# Altium PCB 388D_Control_v1_PCB1_harry.PcbDoc (part 5 of 5)
Units mil, origin at the board's own origin, x right, y up, seen from the top; angles counter-clockwise.
Board outline 4800 x 4000 mil, 6 copper layers (Top Layer, Singal Layer 2, Signal layer 3, Signal Layer 4, Signal Layer 5, Bottom Layer), stack 32.7 mil thick; 431 components, 469 nets, 2000 pads, 719 vias.
Unrouted connection lines stored in the file: 971.
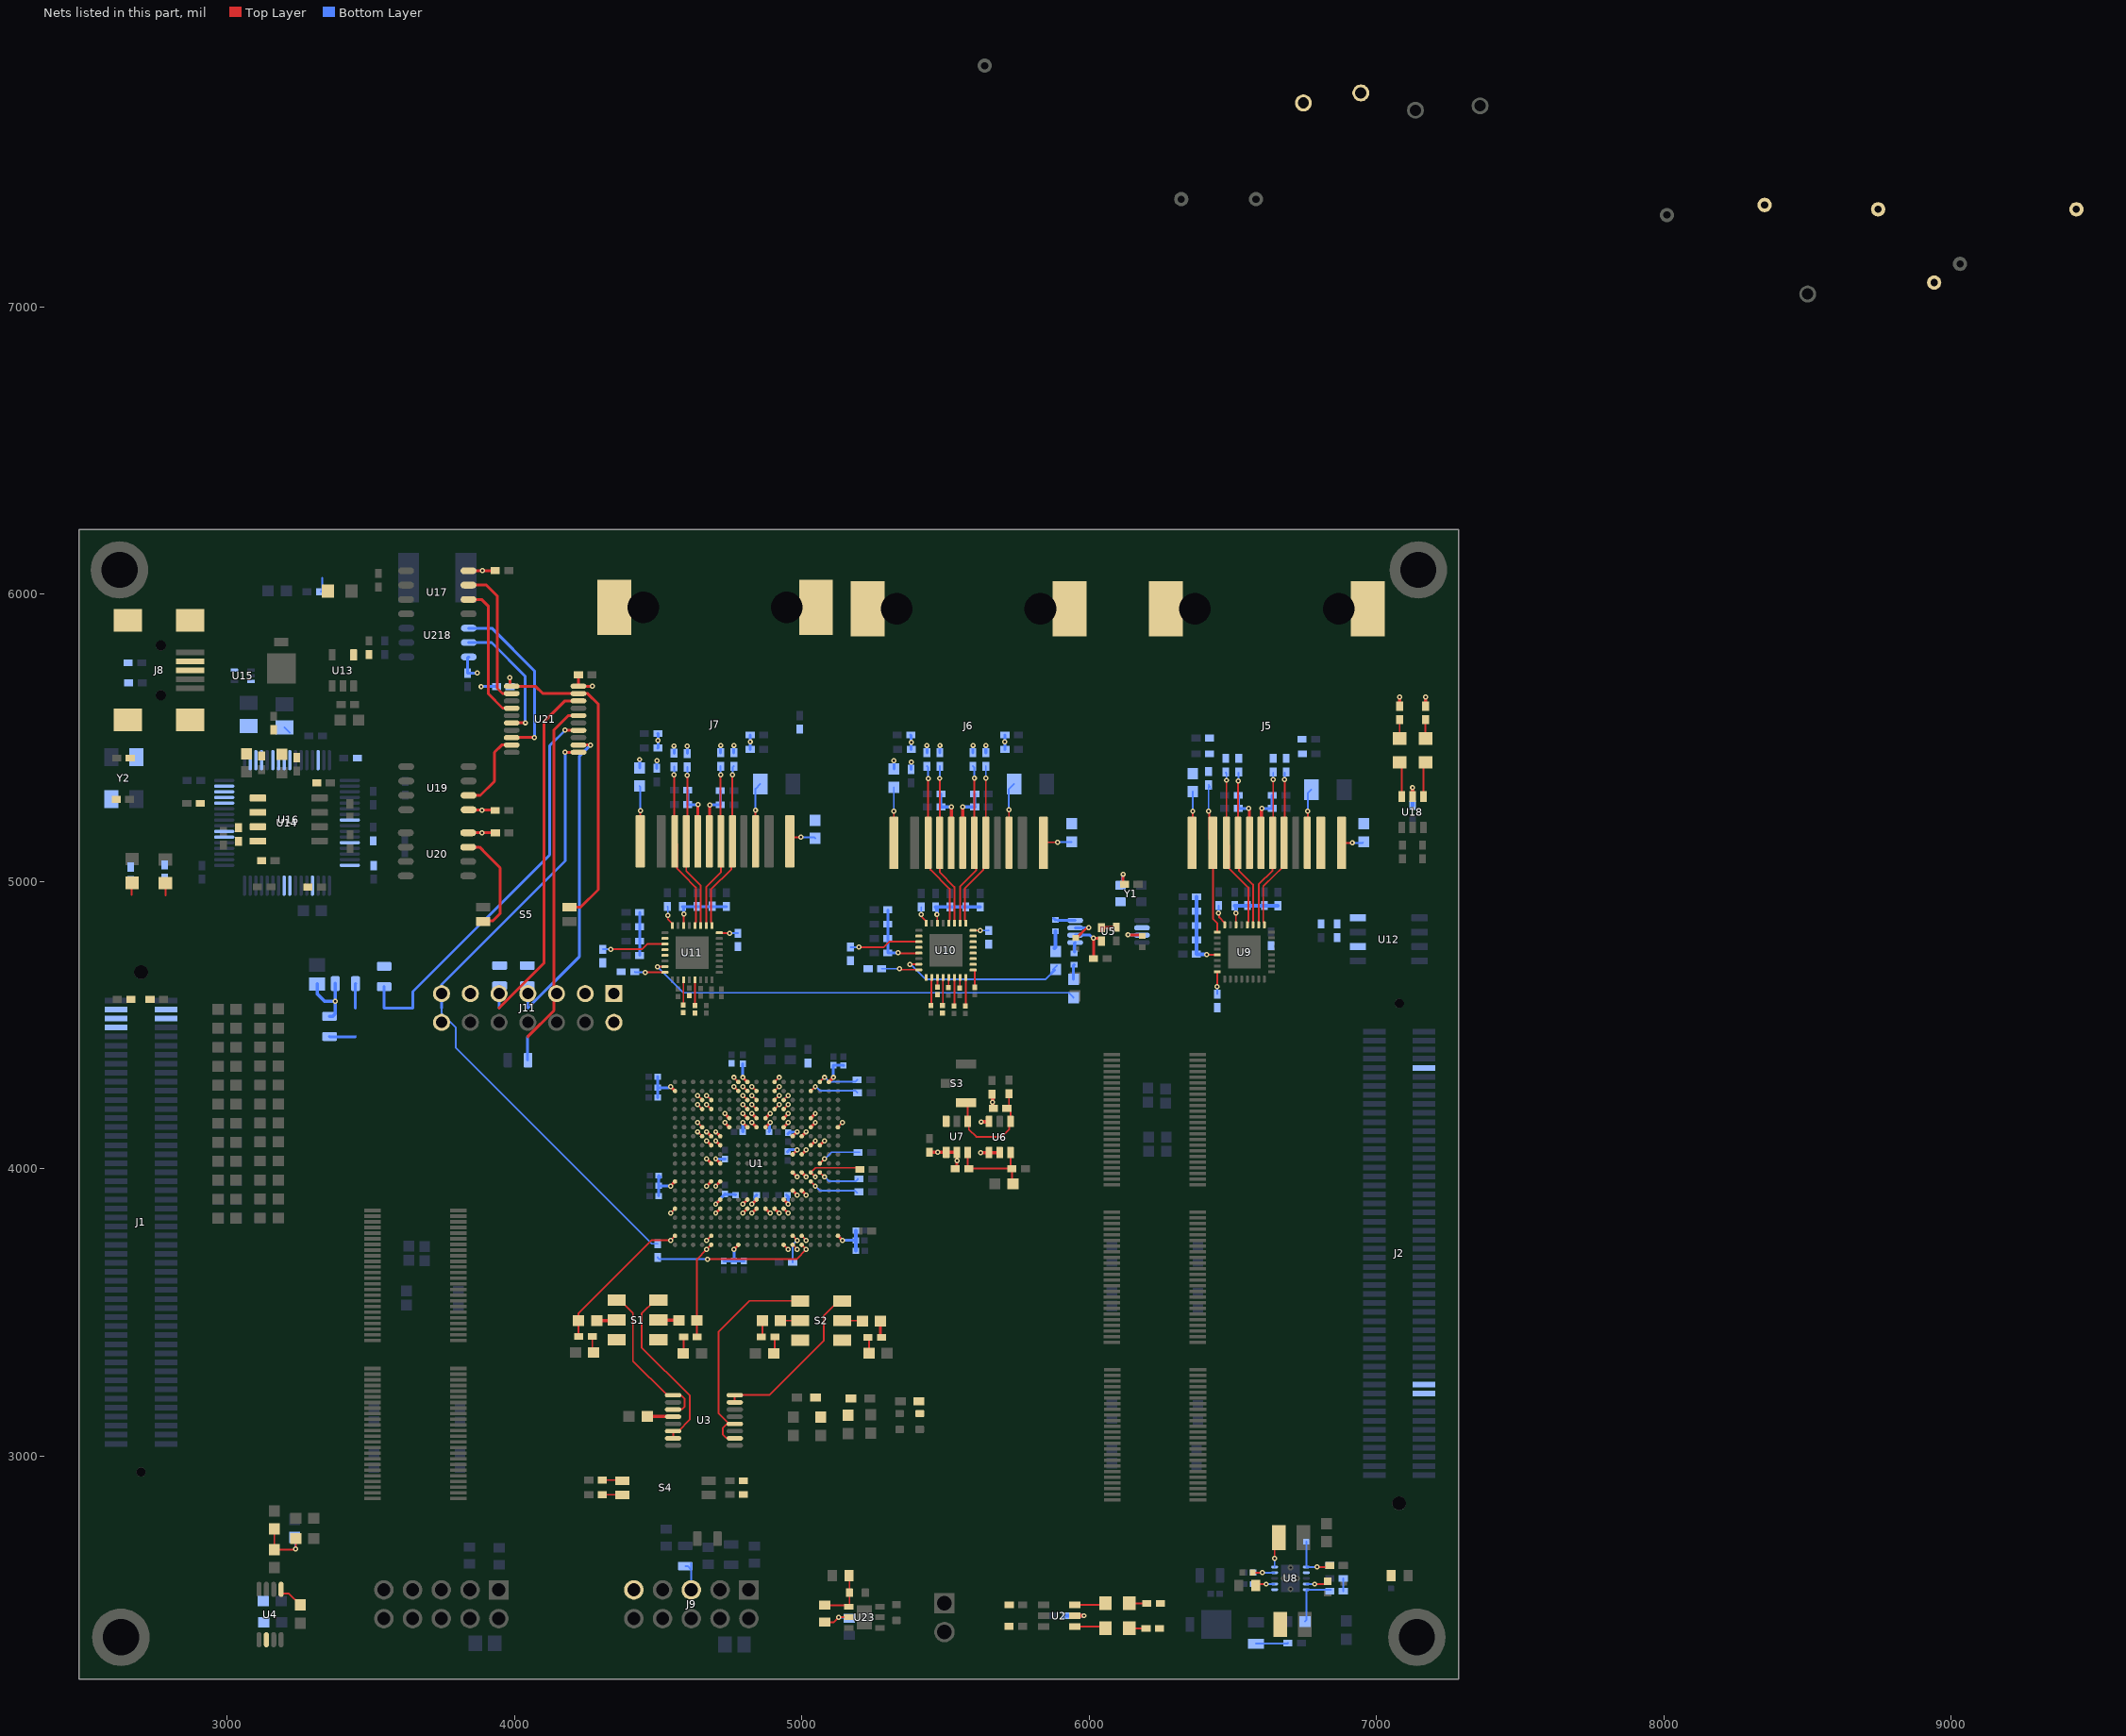
[diagram p5: the nets of this part, all layers, seen from the top]

## Via types
v1: diameter 18, hole 8, Top Layer to Bottom Layer, tented both sides, 703 vias
v2: diameter 19.68, hole 7.87, Top Layer to Bottom Layer, tented both sides, 15 vias
v3: diameter 18/18/18/18/18/18 (per signal layer), hole 8, Top Layer to Bottom Layer, tented both sides, 1 vias

## Nets (pads, with @x,y where several pads share a name; then routed paths per layer and width w, separated by ;. In a path a pad name is that pad's centre, name@x,y a point inside that pad or via, vN(x,y) a via of type N, cw(c..) or ccw(c..) an arc to the next point about the centre after c; other vN are vias at no path point) (continued)
MCU_GPIO151: R101.1 U1.C13 U12.6 | length 22.3
  Top Layer w6.25: U1.C13@4936.26,4239.72 v1(4952.01,4255.47)
MCU_GPIO152: U1.D13 U10.20 U11.20 | length 22.3
  Top Layer w6.25: U1.D13@4936.26,4208.23 v1(4952.01,4223.98)
MCU_GPIO153: R107.2 R132.2 U1.A12 U10.19 U11.19 | length 491.2
  Top Layer w6.25: v1(4334.38,4764.62) 4443.62,4764.62 4461.53,4782.53 4483.53,4782.53 U11.19@4523.27,4782.53 ; U1.A12@4904.76,4302.72 v1(4920.51,4318.46) ; v1(5199,4772) 5285,4772 5303.59,4790.59 U10.19@5406.57,4790.59
  Bottom Layer w6.25: R132.2@4307,4764.62 v1(4334.38,4764.62) ; R107.2@5169,4772 v1(5199,4772)
MCU_GPIO154: J2.92 U1.B12 | length 22.3
  Top Layer w6.25: U1.B12@4904.76,4271.22 v1(4920.51,4286.97)
MCU_GPIO155: U1.C12 U10.18 U11.18 | length 22.3
  Top Layer w6.25: U1.C12@4904.76,4239.72 v1(4920.51,4255.47)
MCU_GPIO156: U1.D12 U10.3 | length 22.3
  Top Layer w6.25: U1.D12@4904.76,4208.23 v1(4920.51,4223.98)
MCU_GPIO157: U1.B10 U10.2 | length 22.3
  Top Layer w6.25: v1(4826.02,4286.97) U1.B10@4841.77,4271.22
MCU_GPIO158: U1.C10 U10.4 | length 22.3
  Top Layer w6.25: v1(4826.02,4255.47) U1.C10@4841.77,4239.72
MCU_GPIO159: U1.D10 U10.5 | length 22.3
  Top Layer w6.25: v1(4826.02,4223.98) U1.D10@4841.77,4208.23
MCU_GPIO160: U1.B9 U10.6 | length 22.3
  Top Layer w6.25: v1(4794.53,4286.97) U1.B9@4810.28,4271.22
MCU_GPIO161: U1.C9 U10.7 | length 22.3
  Top Layer w6.25: v1(4794.53,4255.47) U1.C9@4810.28,4239.72
MCU_GPIO162: R111.2 U1.D9 U10.26 | length 118.2
  Top Layer w6.25: v1(4794.53,4223.98) U1.D9@4810.28,4208.23 ; R111.2@5450.93,4570.99 5450.93,4665.65 U10.26@5451.85,4666.58
MCU_GPIO163: U1.A8 U10.25 | length 22.3
  Top Layer w6.25: v1(4763.03,4318.46) U1.A8@4778.78,4302.72
MCU_GPIO164: R102.1 U1.B8 U10.28 | length 118.1
  Top Layer w6.25: v1(4763.03,4286.97) U1.B8@4778.78,4271.22 ; R102.1@5490.61,4570.99 5490.61,4665.97 U10.28@5491.22,4666.58
MCU_GPIO165: R112.2 U1.C5 U10.30 | length 119
  Top Layer w6.25: v1(4668.54,4255.47) U1.C5@4684.29,4239.72 ; R112.2@5530.3,4569.99 5530.3,4666.28 U10.30@5530.59,4666.58
MCU_GPIO166: R113.2 U1.D5 U10.31 | length 59.4
  Top Layer w6.25: v1(4668.54,4223.98) U1.D5@4684.29,4208.23 ; R113.2@5549,4629.99 5549.64,4630.63 5549.64,4665.94 U10.31@5550.27,4666.58
MCU_GPIO167: R114.2 U1.C4 U10.32 | length 118.9
  Top Layer w6.25: v1(4637.05,4255.47) U1.C4@4652.8,4239.72 ; R114.2@5569.98,4570.01 U10.32@5569.96,4666.58
MCU_GPIO168: R115.2 U1.D4 U10.1 | length 95.1
  Top Layer w6.25: v1(4637.05,4223.98) U1.D4@4652.8,4208.23 ; U10.1@5595.55,4692.17 5600.13,4692.17 5601.92,4690.37 5601.92,4631.99 R115.2@5607.14,4626.77
MCU_TCK: J1.5 J11.9 J11.11 R173.1 U1.V15 U21.14 | length 1429.7
  Top Layer w6.25: U1.V15@4999.25,3767.28 v1(5015,3751.54)
  Top Layer w10: v1(4176,5527) 4176.19,5526.81 4221.95,5526.81 U21.14@4222.14,5526.61
  Bottom Layer w10: R173.1@3546,4634.57 3546,4560 3646,4560 3646,4617 4122,5093 4122,5473 v1(4176,5527)
MCU_TDI: J1.8 J11.3 R172.1 U1.W13 U21.18 | length 1311.7
  Top Layer w6.25: U1.W13@4936.26,3735.79 v1(4952.01,3720.04)
  Top Layer w10: 3946,4560 4102,4716 4102,5556 4174.98,5628.98 U21.18@4222.14,5628.98
  Bottom Layer w10: 3946,4560 3946,4635.57 R172.1@3948,4637.57
MCU_TDO: J1.6 J11.7 R59.1 U21.11 | length 2258.3
  Top Layer w10: v1(4176,5450) 4176.16,5449.84 U21.11@4222.14,5449.84
  Bottom Layer w6.25: 3746,4560 3746,4542 3796,4492 3796,4421 4477.38,3739.62 R59.1@4498,3739.62
  Bottom Layer w10: 3746,4560 3746,4642 4176,5072 v1(4176,5450)
MCU_TMS: J1.3 J11.1 R171.1 U1.W14 U21.12 | length 1148
  Top Layer w6.25: U1.W14@4967.76,3735.79 v1(4983.5,3720.04)
  Top Layer w10: U21.12@4222.14,5475.43 4222.36,5475.22 4263.78,5475.22 v1(4264,5475)
  Bottom Layer w10: R171.1@4044,4637.57 4046,4635.57 4046,4560 4226,4740 4226,5437 v1(4264,5475)
MCU_TRSTn: J1.4 J11.2 R62.2 R175.2 U1.V14 U21.16 | length 1398.2
  Top Layer w6.25: U1.V14@4967.76,3767.28 v1(4983.5,3751.54)
  Top Layer w10: 4046,4460 4137,4551 4137,5528 4186.8,5577.8 U21.16@4222.14,5577.8
  Bottom Layer w6.25: R62.2@4967.62,3675 4967.62,3735.65 v1(4983.5,3751.54)
  Bottom Layer w10: R175.2@4045.04,4379 4045.52,4379.48 4045.52,4459.52 4046,4460
MCU_XRSn: C74.1 J2.22 J9.9 R68.1 S3.1 TP6.1 U1.F19 U6.1 U7.1 | length 397.8
  Top Layer w6.25: U1.F19@5125.24,4145.24 v1(5140.98,4160.98) ; S3.1@5571.7,4230.8 5576.8,4225.7 U7.1@5576.8,4166 5580.81,4162 5580.81,4137.6 5606.54,4111.87 5695.54,4111.87 5721.28,4137.6 5721.28,4160.48 U6.1@5725.8,4165 5725.8,4198.09 ; R68.1@5713.02,4210.87 5720.4,4218.24 C74.1@5720.4,4262.24
MID_SCI-RX: S5.2 U20.7 | length 370.9
  Top Layer w10: U20.7@3838.5,5120 3878,5120 3902,5096 3950,5048 3950,4889 3925.14,4864.14 3894.14,4864.14 S5.2@3891,4861
MID_TCK: U21.6 U218.7 | length 454.4
  Top Layer w10: U21.6@3989.86,5552.2 3990.26,5552.6 4036.6,5552.6 v1(4037,5553)
  Bottom Layer w10: U218.7@3840.5,5832 3920,5832 4037,5715 v1(4037,5553)
MID_TDI: U17.7 U21.2 | length 494.7
  Top Layer w10: U17.7@3839.5,6032 3902,6032 3940,5994 3940,5673 3957.93,5655.07 3989.35,5655.07 U21.2@3989.86,5654.57
MID_TDO: U19.2 U21.9 | length 281.7
  Top Layer w10: U19.2@3840,5300 3881,5300 3930,5349 3930,5450 3955.43,5475.43 U21.9@3989.86,5475.43
MID_TMS: U21.8 U218.6 | length 601.3
  Top Layer w10: U21.8@3989.86,5501.02 3990.35,5501.51 4068.51,5501.51 v1(4069,5502)
  Bottom Layer w10: U218.6@3840.5,5882 3921,5882 4069,5734 v1(4069,5502)
MID_TRSTn: U17.6 U21.4 | length 485.8
  Top Layer w10: U17.6@3839.5,5982 3885,5982 3909,5958 3909,5653 3958.02,5603.98 3989.26,5603.98 U21.4@3989.86,5603.39
NetC26_1: C26.1 R37.2 | length 57.2
  Top Layer w6.25: C26.1@4269,3360.5 4270.62,3362.12 R37.2@4270.62,3417
NetC27_1: C27.1 R38.2 | length 55.6
  Top Layer w6.25: R38.2@4588.38,3415 4588.38,3363.12 C27.1@4591,3360.5
NetC28_1: C28.1 R39.2 | length 58.3
  Top Layer w6.25: C28.1@4902.5,3358 4905.62,3361.13 R39.2@4905.62,3415
NetC29_1: C29.1 R40.2 | length 56.7
  Top Layer w6.25: R40.2@5229.38,3414 5233.5,3409.87 C29.1@5233.5,3359
NetC32_1: C32.1 R41.2 R42.1 R43.1 | length 226.7
  Top Layer w6.25: R41.2@3164,2746.5 R42.1@3164,2675.5 3236.52,2675.5 v1@3239,2677.98 ; C32.1@3238.5,2713 3239,2712.5 v1@3239,2677.98 ; v1@3239,2675.5 v1@3239,2677.98
  Bottom Layer w6.25: R43.1@3235,2716.85 3237.76,2714.09 v1@3237.76,2676.08
  other v1: 3237.76,2676.74
NetC34_1: C34.1 U4.5 | length 95.3
  Top Layer w6.25: U4.5@3187.39,2536.6 3187.39,2527.3 3192.68,2522.01 3214.97,2522.01 3254,2482.98 C34.1@3254,2481.99
NetC36_2: C36.2 R50.1 R53.2 U8.1 | length 217.3
  Top Layer w6.25: v1(6792.93,2614.37) 6830.75,2614.37 C36.2@6836.38,2620
  Bottom Layer w6.25: R53.2@6755,2702.28 6755.06,2702.22 U8.1@6755.12,2614.37 U8.1@6755.12,2614.37 v1(6792.93,2614.37) 6830.75,2614.37 R50.1@6836.38,2620
NetC40_2: C40.2 R45.1 U8.9 | length 109.8
  Top Layer w6.25: R45.1@6567.72,2595 6567.87,2594.84 6602.62,2594.84 v1(6602.78,2594.68)
  Bottom Layer w6.25: C40.2@6570.35,2595 6570.67,2594.68 6607.78,2594.68 U8.9@6644.88,2594.68
NetC41_2: C41.2 R46.1 U8.7 | length 112.2
  Top Layer w6.25: R46.1@6579.53,2550 6584.53,2555 v1(6615,2555)
  Bottom Layer w6.25: C41.2@6570.35,2555 6570.67,2555.31 U8.7@6644.88,2555.31
NetC76_1: C76.1 R71.1 R72.1 TP7.1 U6.6 U7.6 | length 321.4
  Top Layer w6.25: U7.6@5576.8,4057.73 5576.8,4005.09 R71.1@5581.02,4000.87 C76.1@5730.78,4000.87 ; U6.6@5725.8,4056.73 5725.8,4005.84 C76.1@5730.78,4000.87 ; R72.1@5731.05,3945.87 5731.05,4000.6 C76.1@5730.78,4000.87
NetC95_2: C95.2 J5.10 J5.13 J5.14 | length 191
  Top Layer w6.25: J5.10@6758.35,5135 6760,5136.65 v1(6760,5245)
  Bottom Layer w6.25: v1(6760,5245) 6760,5307.09 C95.2@6772.91,5320
NetC113_2: C113.2 J6.10 J6.13 J6.14 | length 207.1
  Top Layer w6.25: J6.10@5720.31,5135 v1@5720.31,5244.69
  Bottom Layer w6.25: v1(5720,5250) 5720,5322.09 C113.2@5737.91,5340
NetC131_2: C131.2 J7.10 J7.13 J7.14 | length 204.4
  Top Layer w6.25: J7.10@4838.35,5140 v1@4838.35,5246.35
  Bottom Layer w6.25: v1(4838,5249) 4838,5323.09 C131.2@4854.91,5340
NetC135_2: C135.2 U13.4
NetC144_1: C144.1 C145.2 L6.1 U14.4 | length 29.6
  Bottom Layer w6.25: U14.4@3119.32,5423.01 U14.4@3119.32,5452.61
NetC146_1: C146.1 C147.2 L7.1 U14.9 | length 26.5
  Bottom Layer w6.25: L7.1@3199,5537 L7.1@3217.74,5518.26
NetC148_2: C148.2 J8.6 J8.7 J8.8 J8.9 R152.1
NetC149_2: C149.2 U14.2 Y2.1
NetC150_2: C150.2 U14.3 Y2.3
NetC161_1: C161.1 R157.1 R160.2 U23.4 | length 193.3
  Top Layer w6.25: R160.2@5080,2481.53 5158.47,2481.53 U23.4@5163,2477 5165.44,2479.44 C161.1@5165.44,2525 5165.44,2583.09 R157.1@5164.53,2584
NetD3_1: D3.1 U2.6 | length 109.5
  Top Layer w6.25: U2.6@5949.13,2482.4 6050.73,2482.4 D3.1@6056.32,2488
NetD3_2: D3.2 R66.2 | length 61.4
  Top Layer w6.25: D3.2@6139,2488 R66.2@6200.38,2488
NetD4_1: D4.1 U2.4 | length 110.3
  Top Layer w6.25: U2.4@5949.13,2407.6 6050.06,2407.6 D4.1@6056.66,2401
NetD4_2: D4.2 R67.2 | length 57.1
  Top Layer w6.25: D4.2@6139.34,2401 6189.38,2401 R67.2@6194.38,2406
NetD5_1: D5.1 U18.6 | length 122.7
  Top Layer w6.25: D5.1@7080,5415.66 7087.6,5408.06 U18.6@7087.6,5296.13
NetD5_2: D5.2 R120.1 | length 65
  Top Layer w6.25: D5.2@7080,5498.34 R120.1@7080,5563.38
NetD6_1: D6.1 U18.4 | length 122.7
  Top Layer w6.25: U18.4@7162.4,5296.13 7162.4,5408.06 D6.1@7170,5415.66
NetD6_2: D6.2 R122.2 | length 65
  Top Layer w6.25: D6.2@7170,5498.34 R122.2@7170,5563.38
NetD8_2: D8.2 R142.2 | length 53.8
  Bottom Layer w6.25: R142.2@3325,6009 3328.94,6009 3331,6011.06 3331,6058
NetD9_1: D9.1 R147.2 | length 42.7
  Top Layer w6.25: 2785,4952 D9.1@2785,4994.66
NetD10_1: D10.1 R148.2 | length 42.1
  Top Layer w6.25: 2668,4954 2668,4994.66 D10.1@2669,4995.66
NetJ5_1: J5.1 R97.2 | length 179.5
  Top Layer w6.25: J5.1@6357.56,5135 6360,5137.44 v1(6360,5245)
  Bottom Layer w6.25: v1(6360,5245) R97.2@6360,5313.5
NetJ5_2: J5.2 R95.1 U9.17 | length 540.6
  Top Layer w6.25: v1(6415,5245) 6417.18,5242.82 6417.18,5147.82 J5.2@6430,5135 6430,4870.43 6445.51,4854.92 U9.17@6445.51,4823.9
  Bottom Layer w4: R95.1@6418.03,5329.41 R95.1@6424.81,5322.63
  Bottom Layer w6.25: v1(6415,5245) 6415,5329.41 6416.97,5331.38 6420,5331.38 R95.1@6415,5336.38
NetJ5_11: J5.11 R94.1 U9.24 | length 77.7
  Top Layer w6.25: v1(6445,4635) 6445,4685.59 U9.24@6445.51,4686.1
  Bottom Layer w6.25: R94.1@6445,4608.62 v1(6445,4635)
NetJ5_12: J5.12 R96.2 | length 78.4
  Top Layer w6.25: J5.12@6878.03,5135 v1(6915,5135)
  Bottom Layer w4: R96.2@6951.5,5135 R96.2@6955,5138.5
  Bottom Layer w6.25: v1(6915,5135) R96.2@6951.5,5135
NetJ6_1: J6.1 R118.2 | length 193.7
  Top Layer w6.25: J6.1@5319.53,5135 5320,5135.47 v1(5320,5245)
  Bottom Layer w6.25: v1(5320,5245) R118.2@5320,5328.5
NetJ6_12: J6.12 R109.2 | length 115.9
  Top Layer w6.25: J6.12@5840,5135 5840,5123.82 5840,5124.18 5852.82,5137 v1(5890,5137)
  Bottom Layer w6.25: v1(5890,5137) 5891.12,5138.12 R109.2@5938.62,5138.12
NetJ7_1: J7.1 R141.2 | length 193.9
  Top Layer w6.25: J7.1@4437.56,5140 4437.56,5246.56 v1(4438,5247)
  Bottom Layer w6.25: R141.2@4435,5332.5 4438,5329.5 v1(4438,5247)
NetJ7_12: J7.12 R133.2 | length 121
  Top Layer w6.25: J7.12@4958.03,5115.79 4958.03,5141.94 4970.85,5154.76 v1(4997.01,5154.76)
  Bottom Layer w6.25: v1(4997.01,5154.76) 5042.24,5154.76 R133.2@5046,5151
NetJ8_2: J8.2 U14.7 U15.5
NetJ8_3: J8.3 U14.8 U15.3
NetJ9_5: J9.5 R162.1 | length 117.3
  Bottom Layer w6.25: R162.1@4594,2617.57 4601.57,2617.57 R162.1@4613.36,2605.78 ; R162.1@4614.36,2627.78 4614.36,2535.64 J9.5@4615,2535
NetJ11_13: J11.13 R174.1 | length 85.2
  Bottom Layer w10: 3446,4560 3446.22,4560.22 3446.22,4644.78 R174.1@3446.43,4645
NetJ11_14: J11.14 R170.1 | length 90.2
  Bottom Layer w10: R170.1@3356,4460.57 3356.28,4460.28 3445.72,4460.28 3446,4460
NetL1_1: L1.1 U8.6
NetL2_1: L2.1 U8.10 | length 109
  Top Layer w6.25: v1(6645,2644) 6645,2702.71 L2.1@6659.57,2717.28
  Bottom Layer w6.25: U8.10@6644.88,2614.37 6644.88,2643.88 v1(6645,2644)
NetLED1_2: LED1.2 R47.1 | length 112.4
  Bottom Layer w6.25: LED1.2@6580,2347.6 6688.98,2347.6 R47.1@6691.38,2350
NetR3_2: R3.2 U1.M16 | length 177.9
  Top Layer w6.25: U1.M16@5030.75,3956.26 v1(5046.5,3940.51)
  Bottom Layer w6.25: v1(5046.5,3940.51) 5046.72,3940.51 5062.23,3925 5184.38,3925 R3.2@5192.38,3917
NetR4_2: R4.2 U1.L16 | length 201.7
  Top Layer w6.25: v1(5046.5,3972.01) U1.L16@5030.75,3987.76 5046.99,4004 5195,4004 R4.2@5201,3998
NetR5_2: R5.2 U1.L17 | length 148.2
  Top Layer w6.25: U1.L17@5062.24,3987.76 v1(5077.99,3972.01)
  Bottom Layer w6.25: v1(5077.99,3972.01) 5079.71,3972.01 5094.72,3957 5186.38,3957 R5.2@5194.38,3965
NetR6_2: R6.2 U1.K17 | length 155.2
  Top Layer w6.25: U1.K17@5062.24,4019.25 v1(5077.99,4035)
  Bottom Layer w6.25: v1(5077.99,4035) 5079.71,4035 5102.71,4058 R6.2@5201.38,4058
NetR7_2: R7.2 U1.A17 | length 146
  Top Layer w6.25: U1.A17@5062.24,4302.72 v1(5077.99,4318.46)
  Bottom Layer w6.25: v1(5077.99,4318.46) 5079.71,4318.46 5095.17,4303 5185.38,4303 R7.2@5192.38,4310
NetR8_2: R8.2 U1.B16 | length 178.3
  Top Layer w6.25: U1.B16@5030.75,4271.22 v1(5046.5,4286.97)
  Bottom Layer w6.25: v1(5046.5,4286.97) 5048.21,4286.97 5063.18,4272 5186.38,4272 R8.2@5193.38,4265
NetR9_1: R9.1 S1.5 | length 70.5
  Top Layer w12: R9.1@4285.5,3472 4353.17,3472 S1.5@4355.17,3474
NetR9_2: R9.2 R37.1 U1.V1 | length 528.4
  Top Layer w6.25: R37.1@4223.38,3417 4222.5,3417.87 R9.2@4222.5,3472 4222.5,3497.5 4476.54,3751.54 v1(4542.56,3751.54) U1.V1@4558.31,3767.28
NetR16_1: R16.1 S1.2 | length 69.7
  Top Layer w12: S1.2@4500.84,3474 R16.1@4570.5,3474
NetR16_2: R16.2 R38.1 U1.W5 | length 341.9
  Top Layer w6.25: R38.1@4635.62,3415 4634.5,3416.13 R16.2@4634.5,3473 4634.5,3685.99 v1(4668.54,3720.04) U1.W5@4684.29,3735.79
NetR25_1: R25.1 S2.5 | length 68.7
  Top Layer w6.25: R25.1@4925.5,3472 S2.5@4994.17,3472
NetR25_2: R25.2 R39.1 U1.R1 | length 81
  Top Layer w6.25: v1(4542.56,3846.02) U1.R1@4558.31,3861.77 ; R39.1@4858.38,3415 4862.5,3419.13 R25.2@4862.5,3472
NetR30_1: R30.1 S2.2 | length 72.7
  Top Layer w6.25: S2.2@5139.83,3472 5210.5,3472 R30.1@5210.5,3470
NetR30_2: R30.2 R40.1 U1.V5 | length 79.6
  Top Layer w6.25: v1(4668.54,3751.54) U1.V5@4684.29,3767.28
  Top Layer w10: R30.2@5273.5,3470 5273.5,3417.13 R40.1@5276.62,3414
NetR44_1: R44.1 U8.4 | length 79
  Top Layer w6.25: v1(6785,2555) 6805.37,2555 ; 6805.39,2555.02 6820.33,2555.02 R44.1@6830,2564.69
  Bottom Layer w6.25: U8.4@6755.12,2555.31 6784.69,2555.31 v1(6785,2555)
NetR48_1: R48.1 R49.2 | length 45
  Bottom Layer w6.25: R49.2@6883.62,2530 R48.1@6883.62,2575
NetR49_1: R49.1 R54.2 U8.5 | length 199.3
  Bottom Layer w6.25: R54.2@6750,2425 6755.12,2430.12 U8.5@6755.12,2535.63 6840.75,2535.63 R49.1@6841.38,2535
NetR51_1: R51.1 R52.2 U8.2
NetR59_2: R59.2 U1.W15 | length 556
  Top Layer w6.25: v1(4672,3686) 4980.96,3686 v1(5015,3720.04) U1.W15@4999.25,3735.79
  Bottom Layer w6.25: R59.2@4498,3692.38 4504.38,3686 v1(4672,3686)
NetR77_1: R77.1 U5.3 | length 97.3
  Top Layer w10: v1(6135,4815) 6136.15,4813.85 6182.41,4813.85 R77.1@6182.91,4813.35
  Bottom Layer w10: v1(6135,4815) 6135.71,4814.29 6182.43,4814.29 U5.3@6183.14,4813.58
NetR78_1: R78.1 U5.8 | length 69.7
  Bottom Layer w10: R78.1@5876.19,4871.53 5881.03,4866.68 R78.1@5883,4866.68 ; R78.1@5890,4864.76 U5.8@5950.86,4864.76
NetR79_1: R79.1 S4.3 | length 70.2
  Top Layer w6.25: R79.1@4305.62,2917 4373,2917 S4.3@4375,2915
NetR80_2: R80.2 S4.4 | length 69.8
  Top Layer w6.25: R80.2@4305.62,2866 4374,2866 S4.4@4375,2865
NetR81_1: R81.1 U5.5 | length 33.9
  Bottom Layer w10: R81.1@5948.68,4755 5948.68,4785.82 U5.5@5950.86,4787.99
NetR82_1: R82.1 Y1.1 | length 67.5
  Top Layer w10: R82.1@6117,4991 v1@6117,5025
  Bottom Layer w10: Y1.1@6115,4986.92 v1@6115,5020.38
  other v1: 6118,5026
NetR83_1: R83.1 U5.7 | length 104.8
  Top Layer w10: R83.1@5953,4803.68 5954.97,4803.68 5988.75,4837.47 5996.47,4837.47 v1(5998,4839)
  Bottom Layer w10: U5.7@5950.86,4839.17 5995.83,4839.17 v1@5996,4839
NetR84_2: R84.2 R86.1 U5.2 | length 52
  Top Layer w10: R84.2@6042,4840 R86.1@6094,4840
NetR89_1: R89.1 U9.16 | length 75.6
  Top Layer w6.25: v1(6450,4890) 6452.25,4887.75 6452.25,4875.23 6471.1,4856.38 U9.16@6471.1,4849.49
  Bottom Layer w6.25: v1(6450,4890) R89.1@6450,4916.38
NetR103_1: R103.1 U10.27 | length 33.8
  Top Layer w6.25: R103.1@5471,4632.99 5471.27,4633.26 5471.27,4666.31 U10.27@5471.53,4666.58
NetR104_1: R104.1 U10.16 | length 61.4
  Top Layer w6.25: v1@5412.3,4882.3 5432.16,4862.44 U10.16@5432.16,4855.55
  Bottom Layer w6.25: v1(5415,4885) R104.1@5415,4911.38
NetR108_1: R108.1 U10.8 | length 54.5
  Top Layer w6.25: U10.8@5595.55,4829.96 v1(5619.96,4829.96)
  Bottom Layer w6.25: v1(5619.96,4829.96) R108.1@5650,4830 R108.1@5650,4830
NetR110_2: R110.2 U10.24 | length 131.5
  Top Layer w6.25: v1@5339,4693.58 5405.16,4693.58 U10.24@5406.57,4692.17 ; v1(5339,4697) v1@5340.42,4695.58
  Bottom Layer w6.25: R110.2@5277.62,4697 v1(5339,4697)
NetR116_2: R116.2 U10.29 | length 36
  Top Layer w6.25: R116.2@5510,4630.99 5510.45,4631.44 5510.45,4666.12 U10.29@5510.9,4666.58
NetR125_1: R125.1 U11.27 | length 83
  Top Layer w6.25: R125.1@4587,4575.98 4587.61,4576.6 4587.61,4657.9 U11.27@4588.23,4658.51
NetR126_1: R126.1 U11.29 | length 81.9
  Top Layer w6.25: U11.29@4627.6,4658.51 4627.8,4658.31 R126.1@4627.8,4576.98 ; R126.1@4627.8,4577.19 R126.1@4628,4576.98
NetR128_1: R128.1 U11.16 | length 72.9
  Top Layer w6.25: v1(4533.25,4882.75) 4533.25,4869.99 4548.86,4854.38 U11.16@4548.86,4847.49
  Bottom Layer w6.25: R128.1@4531.69,4913.31 4533.25,4911.76 v1(4533.25,4882.75)
NetR131_1: R131.1 U11.8 | length 65.8
  Top Layer w6.25: U11.8@4712.24,4821.9 4713.19,4820.95 4748.05,4820.95 v1(4749,4820)
  Bottom Layer w6.25: v1(4749,4820) 4749.62,4820.62 R131.1@4777,4820.62
NetR134_2: R134.2 U11.24 | length 105.5
  Top Layer w6.25: v1(4455,4684) 4455.1,4684.1 U11.24@4523.27,4684.1
  Bottom Layer w6.25: R134.2@4418.62,4686 4420.62,4684 v1(4455,4684)
NetR144_2: R144.2 U14.24
NetR145_1: R145.1 U14.28
NetR146_1: R146.1 U14.32
NetR147_1: R147.1 U14.54
NetR148_1: R148.1 U14.55
NetR149_2: R149.2 R150.1 U16.4 | length 16.3
  Top Layer w6.25: U16.4@3106.72,5141 3110.69,5141 U16.4@3119.38,5132.31
NetR150_2: R150.2 U14.61 U16.3
NetR151_2: R151.2 U14.14
NetR153_2: R153.2 U14.60
NetR154_2: R154.2 U14.6
NetR155_2: R155.2 U14.36 | length 16.2
  Top Layer w6.25: R155.2@3280.38,4981 3284.32,4981 R155.2@3293,4989.69
NetR156_1: R156.1 S5.4 U21.1 U21.19 | length 1162.5
  Top Layer w10: v1(3984,5710) 3984,5683.72 3987.56,5680.16 U21.1@3989.86,5680.16 4072.41,5680.16 4098,5654.57 4242.93,5654.57 4243.01,5654.49 4254.51,5654.49 4291,5618 4291,4972 4230,4911 S5.4@4191,4911
  Bottom Layer w10: R156.1@3984.24,5679 v1@3984.24,5709.76
NetR160_1: R160.1 R161.1 U23.5 | length 127.5
  Top Layer w6.25: R160.1@5080,2422.47 5111.47,2422.47 v1(5128,2439) 5128.6,2439.6 U23.5@5163,2439.6
  Bottom Layer w6.25: v1(5128,2439) 5160.53,2439 R161.1@5164,2435.53
NetS1_3: S1.3 U3.6 U3.7 | length 614.7
  Top Layer w6.25: S1.3@4500.84,3542.9 4489.02,3542.9 4442,3495.87 4442,3379 4609.17,3211.83 4609.17,3127.17 4570.5,3088.5 U3.6@4551.72,3088.5 ; U3.7@4551.72,3062.5 U3.6@4551.72,3087.5
NetS1_6: S1.6 U3.1 U3.3 | length 547.8
  Top Layer w6.25: S1.6@4355.17,3542.9 4366.98,3542.9 4412,3497.87 4412,3331 4529.5,3213.5 4533.42,3213.5 U3.1@4548.72,3213.5 ; U3.1@4548.72,3212.5 4550.53,3210.68 4581.32,3210.68 4592,3200 4592,3173 4582.89,3163.89 4553.11,3163.89 U3.3@4551.72,3162.5
NetS2_3: S2.3 U3.15 U3.16 | length 585.1
  Top Layer w6.25: U3.15@4766.28,3187.5 U3.16@4766.28,3212.5 ; U3.16@4766.28,3213.5 4887.5,3213.5 5076,3402 5076,3488.88 5128.02,3540.9 S2.3@5139.83,3540.9
NetS2_6: S2.6 U3.10 U3.12 | length 798.1
  Top Layer w6.25: U3.12@4744.99,3112.5 4743.17,3110.68 4736.68,3110.68 4725,3099 4725,3075 4735.68,3064.32 4764.47,3064.32 U3.10@4765.99,3062.8 ; U3.12@4745.61,3112.5 4763.28,3112.5 U3.12@4766.28,3112.5 ; U3.12@4763.28,3113.5 4744.99,3113.5 4710,3148.49 4710,3434.1 4816.8,3540.9 S2.6@4994.17,3540.9
NetU14_40: U14.40 U14.41
NetU14_62: U14.62 U16.2
NetU14_63: U14.63 U16.1
P0_25MHZ_CLK: R73.2 R78.2 | length 60.1
  Bottom Layer w12: R73.2@5879,4768.5 5882,4771.5 R78.2@5882,4827.31
P0_PHY_CLK: R73.1 TP8.1 U10.23 | length 647.7
  Top Layer w6.25: v1(5375,4712) 5375.07,4711.93 5406.5,4711.93 U10.23@5406.57,4711.85
  Bottom Layer w6.25: v1(5375,4712) 5378.18,4712 5430.18,4660 5848.42,4660 R73.1@5881,4692.58 ; R73.1@5866.42,4682 R73.1@5871.42,4687 ; R73.1@5867.42,4679 R73.1@5881,4692.58 ; R73.1@5868.42,4680 R73.1@5881,4692.58 ; R73.1@5873.42,4685 R73.1@5881,4692.58 ; R73.1@5873.42,4693 5887,4706.58 R73.1@5887,4707.68
P0_RD_N: J6.8 R106.1 U10.9 | length 577.7
  Top Layer w6.25: U10.9@5569.96,4855.55 5569.96,4862.44 5566.52,4865.88 5566.52,4976.54 5613.53,5023.55 5631.39,5041.41 5631.39,5126.39 J6.8@5640,5135 v1(5640,5360)
  Bottom Layer w6.25: v1(5640,5360) R106.1@5640,5401.38
P0_RD_P: J6.7 R105.1 U10.10 | length 574.1
  Top Layer w6.25: U10.10@5550.27,4855.55 5550.27,4983.27 5605.73,5038.74 5605.73,5126.97 5606.8,5128.04 J6.7@5599.84,5135 v1(5599.84,5359.84)
  Bottom Layer w6.25: R105.1@5595,5401.38 5599.84,5396.54 v1(5599.84,5359.84)
P0_TD_N: J6.4 R99.1 U10.11 | length 567.3
  Top Layer w6.25: v1(5479.37,5359.37) 5479.37,5032.63 5530.59,4981.41 U10.11@5530.59,4855.55
  Bottom Layer w6.25: v1(5479.37,5359.37) 5479.37,5400.75 R99.1@5480,5401.38
P0_TD_P: J6.3 R98.1 U10.12 | length 580.1
  Top Layer w6.25: v1(5439.21,5359.21) J6.3@5439.21,5135 5447.71,5126.5 5447.71,5041.31 5514.34,4974.68 5514.34,4865.88 5510.9,4862.44 U10.12@5510.9,4855.55
  Bottom Layer w6.25: R98.1@5435,5401.38 5439.21,5397.17 v1(5439.21,5359.21)
P1_25MHZ_CLK: R76.2 R81.2 | length 51.6
  Bottom Layer w10: R76.2@5945,4659.5 5945,4708.31 R81.2@5947,4710.31
P1_PHY_CLK: R76.1 TP9.1 U11.23 | length 1519.4
  Top Layer w6.25: v1(4497,4704) 4497.11,4703.89 4523.16,4703.89 U11.23@4523.27,4703.79
  Bottom Layer w6.25: v1(4497,4704) 4588,4613 5929.42,4613 5945,4597.42 R76.1@5945,4596.5
P1_RD_N: J7.8 R130.1 U11.9 | length 588.4
  Top Layer w6.25: U11.9@4686.65,4847.49 4686.65,4854.38 4683.22,4857.81 4683.22,4972.22 4754.74,5043.74 4754.74,5136.7 J7.8@4758.03,5140 4758.03,5370.03 v1(4759,5371)
  Bottom Layer w6.25: v1(4759,5371) 4759,5397.38 R130.1@4763,5401.38
P1_RD_P: J7.7 R129.1 U11.10 | length 575.3
  Top Layer w6.25: U11.10@4666.97,4847.49 4666.97,4980.97 4717.87,5031.87 J7.7@4717.87,5140 4717,5140.87 v1(4717,5371)
  Bottom Layer w6.25: v1(4717,5371) R129.1@4717,5401.38
P1_TD_N: J7.4 R121.1 U11.11 | length 573.4
  Top Layer w6.25: v1(4601,5370) 4601,5143.6 J7.4@4597.4,5140 4597.4,5036.6 4602.16,5031.84 4637.76,4996.24 4647.28,4986.72 U11.11@4647.28,4847.49
  Bottom Layer w6.25: v1(4601,5370) R121.1@4601,5398.76
P1_TD_P: J7.3 R119.1 U11.12 | length 585.2
  Top Layer w6.25: v1(4555,5372) 4555,5142.24 4565.23,5132.02 4565.23,5045.79 4585.91,5025.11 4631.03,4979.99 4631.03,4857.81 4627.6,4854.38 U11.12@4627.6,4847.49
  Bottom Layer w6.25: v1(4555,5372) R119.1@4555,5399.76
RD_N: J5.8 R91.1 U9.9 | length 562.2
  Top Layer w6.25: U9.9@6608.9,4849.49 6608.9,4856.38 6605.46,4859.81 6605.46,4983.48 6644.74,5022.76 6669.15,5047.17 6669.15,5126.12 6680,5136.97 v1(6680,5355)
  Bottom Layer w6.25: v1(6680,5355) R91.1@6680,5379.41
RD_P: J5.7 R90.1 U9.10 | length 550.8
  Top Layer w6.25: U9.10@6589.21,4849.49 6589.21,4990.21 6637.73,5038.74 6637.73,5134.86 6640,5137.13 v1(6640,5355)
  Bottom Layer w6.25: v1(6640,5355) R90.1@6640,5379.25
TD_N: J5.4 R88.1 U9.11 | length 557.7
  Top Layer w6.25: v1(6518.7,5350.52) 6517.4,5349.22 J5.4@6517.4,5135 6510.44,5128.04 6520.26,5118.21 6520.26,5038.74 6560,4999 6569.53,4989.47 U9.11@6569.53,4849.49
  Bottom Layer w6.25: v1(6518.7,5350.52) 6518.7,5377.48 R88.1@6520,5378.78
TD_P: J5.3 R87.1 U9.12 | length 563.5
  Top Layer w6.25: v1(6477.24,5352.76) J5.3@6477.24,5135 6486.13,5126.12 6486.13,5046.87 6553.28,4979.72 6553.28,4859.81 6549.84,4856.38 U9.12@6549.84,4849.49
  Bottom Layer w6.25: R87.1@6475,5379.13 6477.24,5376.89 v1(6477.24,5352.76)
VDD_1V2: C44.2 C45.2 C46.2 C47.2 C48.2 C49.2 C50.2 C72.2 J2.20 L5.2 R55.2 TP3.1 U1.E9 U1.E11 U1.F9 U1.F11 U1.G14 U1.G15 U1.J14 U1.J15 U1.K5 U1.K6 U1.P10 U1.P13 U1.R10 U1.R13 U7.3 | length 554.9
  Top Layer w10: v1(4668.54,4035) U1.K5@4684.29,4019.25 ; v1(4700.04,4035) U1.K6@4715.79,4019.25 ; v1(4794.53,4160.98) U1.F9@4810.28,4145.24 ; v1(4794.53,4192.48) U1.E9@4810.28,4176.73 ; v1(4826.02,3846.02) U1.R10@4841.77,3861.77 ; v1(4826.02,3877.52) U1.P10@4841.77,3893.27 ; U1.F11@4873.27,4145.24 v1(4889.02,4160.98) ; U1.E11@4873.27,4176.73 v1(4889.02,4192.48) ; U1.R13@4936.26,3861.77 v1(4952.01,3846.02) ; U1.P13@4936.26,3893.27 v1(4952.01,3877.52) ; U1.J14@4967.76,4050.75 v1(4983.5,4066.5) ; U1.G14@4967.76,4113.74 v1(4983.5,4129.49) ; U1.J15@4999.25,4050.75 v1(5015,4066.5) ; U1.G15@4999.25,4113.74 v1(5015,4129.49)
  Bottom Layer w10: v1(4700.04,4035) 4700.22,4034.82 4731.82,4034.82 C50.2@4732,4034.65 ; C45.2@4794.35,4129 4794.44,4129.09 4794.44,4160.9 v1(4794.53,4160.98) ; v1(4826.02,3877.52) 4826.02,3879.68 4836.23,3889.89 4836.23,3903.37 4841.86,3909 C49.2@4842.65,3909 ; C44.2@4885.29,4129 4887.49,4131.19 4887.49,4159.45 v1(4889.02,4160.98) ; C48.2@4946.38,3909 4952.01,3903.37 v1(4952.01,3877.52) ; C47.2@4950,4059.35 4950,4060.14 4955.63,4065.77 4956.42,4065.77 4957.14,4066.5 v1(4983.5,4066.5) ; C46.2@4951,4122 4951,4122.33 4956.63,4127.96 4981.97,4127.96 v1(4983.5,4129.49)
VDD_3V3: C43.1 C55.2 C56.2 C57.2 C58.2 C59.2 C60.2 C61.2 C62.2 C63.2 C64.2 C65.2 C66.2 C67.2 C68.2 C69.2 C70.2 C73.1 C75.1 C77.1 C78.1 C79.1 C80.1 C81.1 C82.1 C83.1 C84.1 C85.1 C86.1 C87.1 C88.1 C89.2 C90.2 C91.2 C92.2 C93.1 C94.1 C96.1 C97.1 C98.1 C99.1 C100.1 C101.1 C102.1 C103.1 C104.1 C105.1 C106.2 C107.2 C108.1 C109.2 C110.2 C111.1 C112.1 C114.1 C115.1 C116.1 C117.1 C118.1 C119.1 C120.1 C121.1 C122.1 C123.1 C124.2 C125.2 C126.1 C127.2 C128.2 C129.1 C130.1 C152.1 C153.2 C155.1 C157.1 C159.1 C165.1 J5.5 J5.6 J6.5 J6.6 J7.5 J7.6 J11.5 L3.2 R66.1 R67.1 R68.2 R69.2 R70.2 R71.2 R74.1 R75.2 R84.1 R87.2 R88.2 R90.2 R91.2 R92.1 R93.2 R94.2 R95.2 R96.1 R97.1 R98.2 R99.2 R100.2 R101.2 R102.2 R103.2 R105.2 R106.2 R107.1 R108.2 R109.1 R110.1 R117.2 R118.1 R119.2 R120.2 R121.2 R122.1 R125.2 R126.2 R127.2 R129.2 R130.2 R131.2 R132.1 R133.1 R134.1 R140.2 R141.1 R156.2 R170.2 R171.2 R172.2 R173.2 R174.2 R176.2 R177.1 TP2.1 U1.A9 U1.A18 U1.B1 U1.E7 U1.E10 U1.E13 U1.E16 U1.F4 U1.F7 U1.F10 U1.F13 U1.F16 U1.G4 U1.G5 U1.G6 U1.H5 U1.H6 U1.H16 U1.H17 U1.L14 U1.L15 U1.M1 U1.M5 U1.M6 U1.N14 U1.N15 U1.P9 U1.R9 U1.R11 U1.R12 U1.V19 U1.W8 U2.5 U5.6 U6.3 U6.4 U6.5 U7.4 U7.5 U9.14 U9.21 U10.14 U10.21 U11.14 U11.21 U12.8 U17.8 U18.5 U19.1 U20.8 U21.20 U218.8 Y1.4 | length 5865.4
  Top Layer w4: U9.21@6444.9,4745.77 U9.21@6445.51,4745.16
  Top Layer w6.25: U11.14@4588.23,4847.49 4588.61,4847.87 4588.61,4886.61 v1(4589,4887) ; v1(4637.05,4129.49) U1.G4@4652.8,4113.74 ; v1(4637.05,4160.98) U1.F4@4652.8,4145.24 ; v1(5334,4752) v1@5334.61,4752.61 ; v1@5334.31,4750.61 5405.96,4750.61 U10.21@5406.57,4751.22 ; v1(5470,4885) 5470.77,4884.23 5470.77,4856.32 U10.14@5471.53,4855.55 ; v1@6409,4745.58 6444.71,4745.58 U9.21@6444.9,4745.77 ; U9.14@6510.24,4849.73 v1@6510.24,4889.76
  Top Layer w10: U20.8@3838.5,5170 v1(3885.94,5170) C159.1@3933.38,5170 ; U17.8@3839.5,6082.38 v1(3888.56,6082.38) C152.1@3932.38,6082.38 3937.62,6082.38 C152.1@3938,6082 ; U19.1@3840,5250 3840.5,5249.5 3886.5,5249.5 v1(3887,5249) 3915.76,5249 ; C153.2@4222.38,5720 4222.14,5719.76 U21.20@4222.14,5680.16 v1(4270.84,5680.16) v1@4271,5680 ; v1(4542.56,3940.51) U1.M1@4558.31,3956.26 ; v1(4542.56,4286.97) U1.B1@4558.31,4271.22 ; J7.5@4637.56,5140 4637.78,5140.22 4637.78,5267.78 v1(4638,5268) ; v1(4668.54,3940.51) U1.M5@4684.29,3956.26 ; v1(4668.54,4097.99) U1.H5@4684.29,4082.24 ; v1(4668.54,4129.49) U1.G5@4684.29,4113.74 ; J7.6@4677.72,5140 4678.86,5141.14 4678.86,5265.86 v1(4680,5267) ; v1(4700.04,3940.51) U1.M6@4715.79,3956.26 ; v1(4700.04,4097.99) U1.H6@4715.79,4082.24 ; v1(4700.04,4129.49) U1.G6@4715.79,4113.74 ; v1(4731.54,4160.98) U1.F7@4747.28,4145.24 ; v1(4731.54,4192.48) U1.E7@4747.28,4176.73 ; v1(4763.03,3720.04) U1.W8@4778.78,3735.79 ; v1(4794.53,3846.02) U1.R9@4810.28,3861.77 ; v1(4794.53,3877.52) U1.P9@4810.28,3893.27 ; v1(4794.53,4318.46) U1.A9@4810.28,4302.72 ; v1(4826.02,4160.98) U1.F10@4841.77,4145.24 ; v1(4826.02,4192.48) U1.E10@4841.77,4176.73 ; U1.R11@4873.27,3861.77 v1(4889.02,3846.02) ; U1.R12@4904.76,3861.77 v1(4920.51,3846.02) ; U1.F13@4936.26,4145.24 v1(4952.01,4160.98) ; U1.E13@4936.26,4176.73 v1(4952.01,4192.48) ; U1.N14@4967.76,3924.76 v1(4983.5,3909.02) ; U1.L14@4967.76,3987.76 v1(4983.5,3972.01) ; U1.N15@4999.25,3924.76 v1(5015,3909.02) ; U1.L15@4999.25,3987.76 v1(5015,3972.01) ; U1.H16@5030.75,4082.24 v1(5046.5,4097.99) ; U1.F16@5030.75,4145.24 v1(5046.5,4160.98) ; U1.E16@5030.75,4176.73 v1(5046.5,4192.48) ; U1.H17@5062.24,4082.24 v1(5077.99,4097.99) ; U1.V19@5125.24,3767.28 v1(5140.98,3751.54) ; R71.2@5533.78,4000.87 5539.4,4006.49 U7.5@5539.4,4057.73 ; C78.1@6014.38,4732 6015,4732.62 v1(6015,4803) 6035.19,4803 6042,4796.19 R84.1@6042,4792.76 ; v1(6555,5255) 6556.28,5253.72 6556.28,5136.28 J5.5@6557.56,5135 ; J5.6@6597.72,5135 6598.86,5136.14 6598.86,5253.86 v1(6600,5255)
  Top Layer w12: U1.A18@5093.74,4302.72 v1(5109.49,4318.46) ; C77.1@5443.54,4058.24 5443.8,4057.99 5501.74,4057.99 U7.4@5502,4057.73 U7.5@5539.4,4057.73 ; J6.5@5519.53,5135 5519.76,5135.24 v1(5519.76,5259.76) ; J6.6@5559.68,5135 5559.68,5259.68 v1(5560,5260) ; v1@5622,4056 5622.73,4056.73 U6.4@5651,4056.73 U6.5@5688.4,4056.73 ; v1(5624,4164) 5650,4164 U6.3@5651,4165 ; C75.1@5661.4,4260.24 5663.59,4258.06 5663.59,4213.06 R68.2@5665.78,4210.87 ; U2.5@5949.13,2445 v1(5981,2445) ; v1(6510,4890) v1@6510.24,4889.76 ; R120.2@7080,5610.62 v1(7080,5642) ; U18.5@7125,5296.13 v1(7125,5327) ; R122.1@7170,5610.62 v1(7170,5642)
  Bottom Layer w10: U218.8@3840.5,5782 3836,5777.5 C155.1@3836,5725.62 3869.62,5725.62 v1(3870,5726) ; v1(3884,5679) R156.2@3937,5679 ; R141.1@4435,5395.5 v1(4435,5425.02) ; C117.1@4435.24,4743 C116.1@4435.24,4793 C115.1@4435.24,4843 C114.1@4435.24,4893 ; R140.2@4495,5394.62 v1(4495,5420.21) ; C70.2@4497.35,4248 4497.57,4248.21 C65.2@4497.57,4283 ; C65.2@4497.35,4283 C65.2@4497.57,4283 ; C66.2@4497.78,4320.9 4497.57,4320.69 C65.2@4497.57,4283 ; C123.1@4498.62,5465 4499,5465.38 4499,5514.62 C122.1@4498.62,5515 ; C68.2@4500.57,3971.69 4500.78,3971.9 C68.2@4501.57,3971.9 ; C67.2@4501.35,3906 4501.57,3906.21 C69.2@4501.57,3941 ; C69.2@4501.35,3941 C69.2@4501.57,3941 ; C68.2@4501.57,3976.69 C68.2@4501.57,3971.9 ; C68.2@4502.57,3976.9 4508.2,3971.27 C68.2@4508.2,3970.48 ; v1@4536.88,3941 C69.2@4501.57,3941 ; v1@4540.4,3940.51 v1(4542.56,3940.51) ; v1(4542.56,4286.97) 4540.4,4286.97 4536.43,4283 C65.2@4497.57,4283 ; R119.2@4555,5447 v1(4555,5472.59) ; v1(4589,4887) 4589,4908.38 C121.1@4584,4913.38 C120.1@4635,4913.38 C118.1@4737,4913.38 ; R121.2@4601,5446 v1(4601,5471.59) ; C125.2@4603,5318 C124.2@4603,5268 v1(4638,5268) ; v1(4680,5267) C127.2@4715.76,5267 C128.2@4715.76,5317 ; R129.2@4717,5448.62 v1(4717,5474.21) ; C62.2@4728,3679 4728.35,3679.35 4797.65,3679.35 C58.2@4798,3679.71 C58.2@4797.52,3680.19 ; R130.2@4763,5448.62 v1(4763,5474.21) ; v1(4763.03,3720.04) 4763.52,3719.56 C61.2@4763.52,3684.19 ; C64.2@4794,4366.65 4794.26,4366.38 4794.26,4318.73 v1(4794.53,4318.46) ; C129.1@4820,5460 C130.1@4820,5510 ; C56.2@5109,4360.65 C56.2@5109.23,4360.42 ; v1(5109.49,4318.46) 5109.24,4318.71 C56.2@5109.24,4360.4 ; v1(5140.98,3751.54) 5141.3,3751.22 5186.75,3751.22 C59.2@5187.07,3750.9 ; C57.2@5144.78,4360.19 5144.55,4360.42 C56.2@5109.23,4360.42 ; C100.1@5299,4902 C101.1@5299,4852 C102.1@5299,4802 C103.1@5299,4752 v1(5334,4752) ; R118.1@5320,5391.5 v1(5320,5421.02) ; C104.1@5378.62,5510 5380,5508.62 C105.1@5380,5460 ; R117.2@5380,5390.62 v1(5380,5416.21) ; R98.2@5435,5448.62 v1(5435,5474.21) ; R99.2@5480,5448.62 v1(5480,5474.21) ; C107.2@5483.62,5260 C106.2@5483.62,5305 ; R105.2@5595,5448.62 v1(5595,5474.21) ; C109.2@5601.38,5260 C110.2@5601.38,5305 ; R106.2@5640,5448.62 v1(5640,5474.21) ; C111.1@5706.38,5460 5706,5460.38 5706,5509.62 C112.1@5706.38,5510 ; U5.6@5950.86,4813.58 6002.25,4813.58 6012.84,4803 v1(6015,4803) ; C89.2@6518.62,5300 C90.2@6518.62,5255 v1(6555,5255) ; v1(6600,5255) C91.2@6636.38,5255 C92.2@6636.38,5300 ; C69.2@4501.57,3941 C68.2@4501.57,3971.9
  Bottom Layer w12: C165.1@3313,4643.54 3313,4610.07 3340.07,4583 v1(3375.96,4583) ; R170.2@3356,4531.04 3366.63,4531.04 3375.96,4540.37 v1(3375.96,4583) ; R174.2@3375.96,4645 v1(3375.96,4583) ; C60.2@5187.65,3715 C55.2@5187.65,3786 ; v1(5470,4885) 5470,4906.38 C99.1@5465,4911.38 C98.1@5515,4911.38 C97.1@5570,4911.38 C96.1@5620,4911.38 ; C107.2@5483.62,5260 5483.74,5259.88 5519.65,5259.88 v1(5519.76,5259.76) ; v1(5560,5260) C109.2@5601.38,5260 ; C73.1@5918.62,2445 v1(5981,2445) ; C86.1@6372.38,4947.75 C86.1@6373.06,4947.06 C84.1@6373.06,4897.06 C83.1@6373.06,4847.06 C85.1@6373.06,4797.06 R92.1@6373.06,4748 ; R92.1@6372.62,4748 6373.62,4747 6408,4747 v1(6409,4746) ; v1(6510,4890) 6510,4912.13 C82.1@6506.06,4916.06 C81.1@6656.06,4916.06 ; C126.1@7125,5265.62 v1(7125,5327)
  other v1: 5539.4,4028.2 5622.37,4056.37 5472.77,4057.99 5663.59,4232.52 5380,5485 4820,5486 5706,5486 4499,5491
VDDA_3V3: C25.2 C30.1 C31.1 C51.2 C52.2 C54.1 L4.2 S1.1 S1.4 S2.1 S2.4 U1.P6 U1.R6 U3.4 U4.2 | length 218.8
  Top Layer w10: v1(4700.04,3846.02) U1.R6@4715.79,3861.77 ; v1(4700.04,3877.52) U1.P6@4715.79,3893.27
  Top Layer w12: C25.2@4462,3138.5 U3.4@4548.72,3138.5
  Bottom Layer w10: v1(4700.04,3877.52) 4701.57,3879.05 4701.57,3881.43 4732,3911.86 C52.2@4732,3912.65 4733.82,3910.82 4767.82,3910.82 C51.2@4769.65,3909
pads on no net: J1. J1.13 J1.16 J1.29 J1.32 J1.41 J1.43 J1.44 J1.57 J1.58 J1.68 J2. J2.15 J2.16 J2.17 J2.18 J2.19 J2.38 J2.75 J2.76 J2.77 J2.78 J2.79 J2.83 J2.84 J2.94 J2.95 J2.96 J2.97 J2.99 J5.9 J5.ALIGN1 J5.ALIGN2 J6.9 J6.ALIGN1 J6.ALIGN2 J7.9 J7.ALIGN1 J7.ALIGN2 J8.4 J8.ALIGN1 J8.ALIGN2 J9.6 J9.7 J9.8 J10.5 J10.6 J10.7 J10.8 J10.9 J11.6 U1.H4 U1.J18 U1.J19 U1.V13 U1.W12 U3.8 U3.9 U4.1 U4.3 U4.7 U4.8 U8.V U9.13 U9.15 U9.22 U9.33@6511.06,4726.06 U9.33@6511.06,4783.94 U9.33@6568.94,4726.06 U9.33@6568.94,4783.94 U10.13 U10.15 U10.22 U10.33@5472.13,4732.13 U10.33@5472.13,4790 U10.33@5530,4732.13 U10.33@5530,4790 U11.13 U11.15 U11.22 U11.33@4588.82,4724.06 U11.33@4588.82,4781.94 U11.33@4646.69,4724.06 U11.33@4646.69,4781.94 U14.22 U14.23 U14.26 U14.27 U14.29 U14.30 U14.33 U14.34 U14.43 U14.44 U14.45 U14.46 U14.48 U14.52 U14.53 U14.57 U14.58 U14.59 U15.2 U16.7 U20.6 U21.3 U21.5 U21.7
copper on no net: | length 1412.7
  Top Layer w6.25: 2910.74,2616 2995.5,2616 ; v1(6307.45,3806.31) 6310.63,3806.31 6313.64,3809.32 6376.59,3809.32 ; v1(6307.45,3832.31) 6310.63,3832.31 6313.94,3829 6376.59,3829 ; v1(6308.45,3775.31) 6310.7,3773.06 6319.88,3773.06 6322.99,3769.95 6376.59,3769.95 ; v1(6309.45,3751.31) 6309.98,3750.78 6376.06,3750.78 6376.59,3750.26 ; v1(6310.45,3659.31) 6313.63,3659.31 6321.1,3651.84 6376.59,3651.84 ; v1(6310.45,3711.31) 6310.66,3711.1 6376.38,3711.1 6376.59,3710.89 ; v1(6311.45,3469.31) 6314.63,3469.31 6319.99,3474.67 6376.59,3474.67 ; v1(6311.45,3636.31) 6313.7,3634.06 6321.88,3634.06 6323.79,3632.15 6376.59,3632.15 ; v1(6311.45,3687.31) 6313.7,3689.56 6319.88,3689.56 6321.53,3691.21 6376.59,3691.21 ; v1(6312.45,3412.31) 6314.7,3414.56 6321.88,3414.56 6322.94,3415.62 6376.59,3415.62 ; v1(6312.45,3436.31) 6312.96,3435.8 6376.08,3435.8 6376.59,3435.3 ; v1(6312.45,3493.31) 6312.98,3493.83 6376.06,3493.83 6376.59,3494.36 ; v1(6312.45,3555.31) 6314.35,3553.41 6376.59,3553.41 ; v1(6312.45,3589.31) 6314.7,3591.56 6320.88,3591.56 6322.1,3592.78 6376.59,3592.78 ; v1(6312.45,3611.31) 6313.03,3611.89 6376.01,3611.89 6376.59,3612.47 ; v1(6313.45,3532.31) 6314.87,3533.73 6376.59,3533.73
  Top Layer w10: v1(6332.45,3453.31) 6333.29,3454.15 6375.75,3454.15 6376.59,3454.99 ; v1(6332.45,3512.31) 6333.32,3513.17 6375.72,3513.17 6376.59,3514.04 ; v1@6334.45,3573.31 v1(6334.66,3573.1) 6376.59,3573.1 ; v1@6334.45,3671.31 6334.66,3671.52 6376.59,3671.52 ; v1(6334.45,3730.31) 6334.59,3730.44 6376.45,3730.44 6376.59,3730.58 ; v1(6334.45,3791.31) 6335.29,3790.47 6375.75,3790.47 6376.59,3789.63
  other v1: 6334.56,3671.41 4857.52,3783.03 4857.52,4286.97

## Polygon pours and split planes (outlines as drawn)
VDD_3V3 on Signal layer 3 "VDD_3V3_L03_P000" (solid, pour order 0): 3802,6130 4306,6130 4306,5686 7215,5686 7215,5202 4299,5202 4299,5120 3806.69,5120

## Keep-outs
Keep-Out Layer:
  region: 3780,6225 3780,4910 3640,4770 2485,4770 2485,4860 3600,4860 3685,4945 3685,6225

## Silkscreen, mask and mechanical layers (free items; w line width, h text height)
Bottom Solder:
  lines w50: 2510,2250 7260,2250 7260,6200 2510,6200 2510,2250
M1 Board Outline:
  lines w10: 2489.92,2230 7280,2230 7280,6220 2489.92,6220 2489.92,2230
M2 Board Dimensions:
  circle w10: c1710,3525 r521.65
  rectangle: 2460,7210 2585,7335
  rectangle: 2585,7085 2960,7210
  lines w7: 2460,7210 3460,7210 ; 2585,7085 2585,7335 ; 2710,7085 2710,7335 ; 2960,7085 2960,7335 ; 3210,7085 3210,7335 ; 2460,7085 3460,7085 3460,7335 2460,7335 2460,7085
  text "500KRW" at 1535,3495 h30
Mechanical 6:
  rectangle: 2485,4770 3640,4859.39
  rectangle: 3685.43,4910 3780,6225
  region: 3640,4770 3780,4910 3715,4975 3575,4835
M9 Title Sheet:
  lines w10: 1205,1205 1205,11895 16295,11895 16295,1205 ; 10895,1005 10995,1005 ; 10995,8975 10995,8995 ; 1005,1005 1005,12095 16495,12095 16495,1005 1005,1005
M11 gerber information:
  lines w10: 1204.5,1206.67 3672.83,1206.67 ; 1204.5,1410 3674.5,1410 3674.5,1208.33 ; 1205,1206.67 1205,1410
  text "LAYER NAME =" at 1268,1278.34 h30

## Dimensions
2460,7085 to 3460,7085 on M2 Board Dimensions
2485,6225 to 7285,6225 on M2 Board Dimensions
2485,2225 to 2485,6225 on M2 Board Dimensions

## Text inside footprints (layer, text, board x,y; h text height)
L3: Mechanical 6 "Land Pattern Adapted for Flow Soldering" at 5242.87,3177.38 h30 r180
S4: Mechanical 5 "1" at 4619.49,2842.76 h30 r90
S5: Mechanical 5 "1" at 3946.51,4933.24 h30 r270
U1: Top Overlay "Designator195" at 4498.78,4363.9 h30; Top Overlay "RefDes" at 4766.77,3994.25 h30
U8: Bottom Overlay "RefDes" at 6775,2550 h30